# Altium PCB PCB2_new.PcbDoc
Units mm, origin at the board's own origin, x right, y up, seen from the top; angles counter-clockwise.
Board outline 152.4 x 101.6 mm, 2 copper layers (Top Layer, Bottom Layer); 19 components, 32 nets, 102 pads, 0 vias.
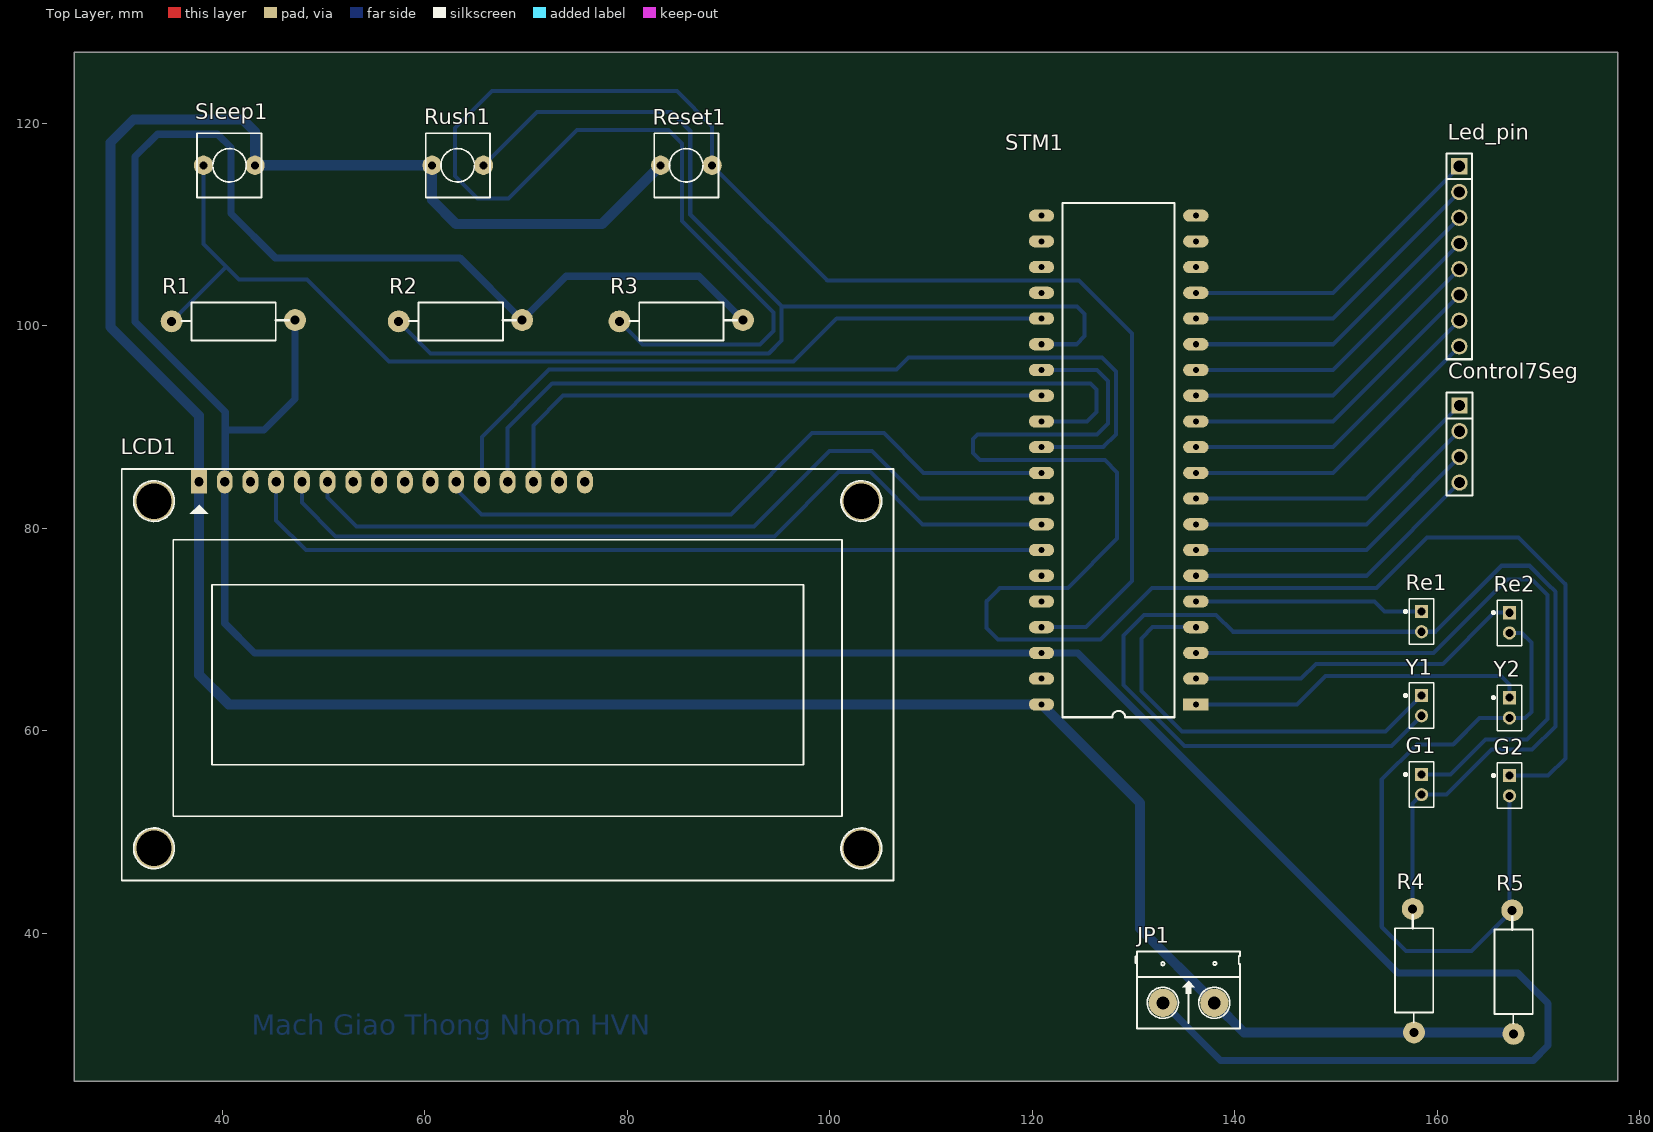
[diagram p0: Top Layer view]
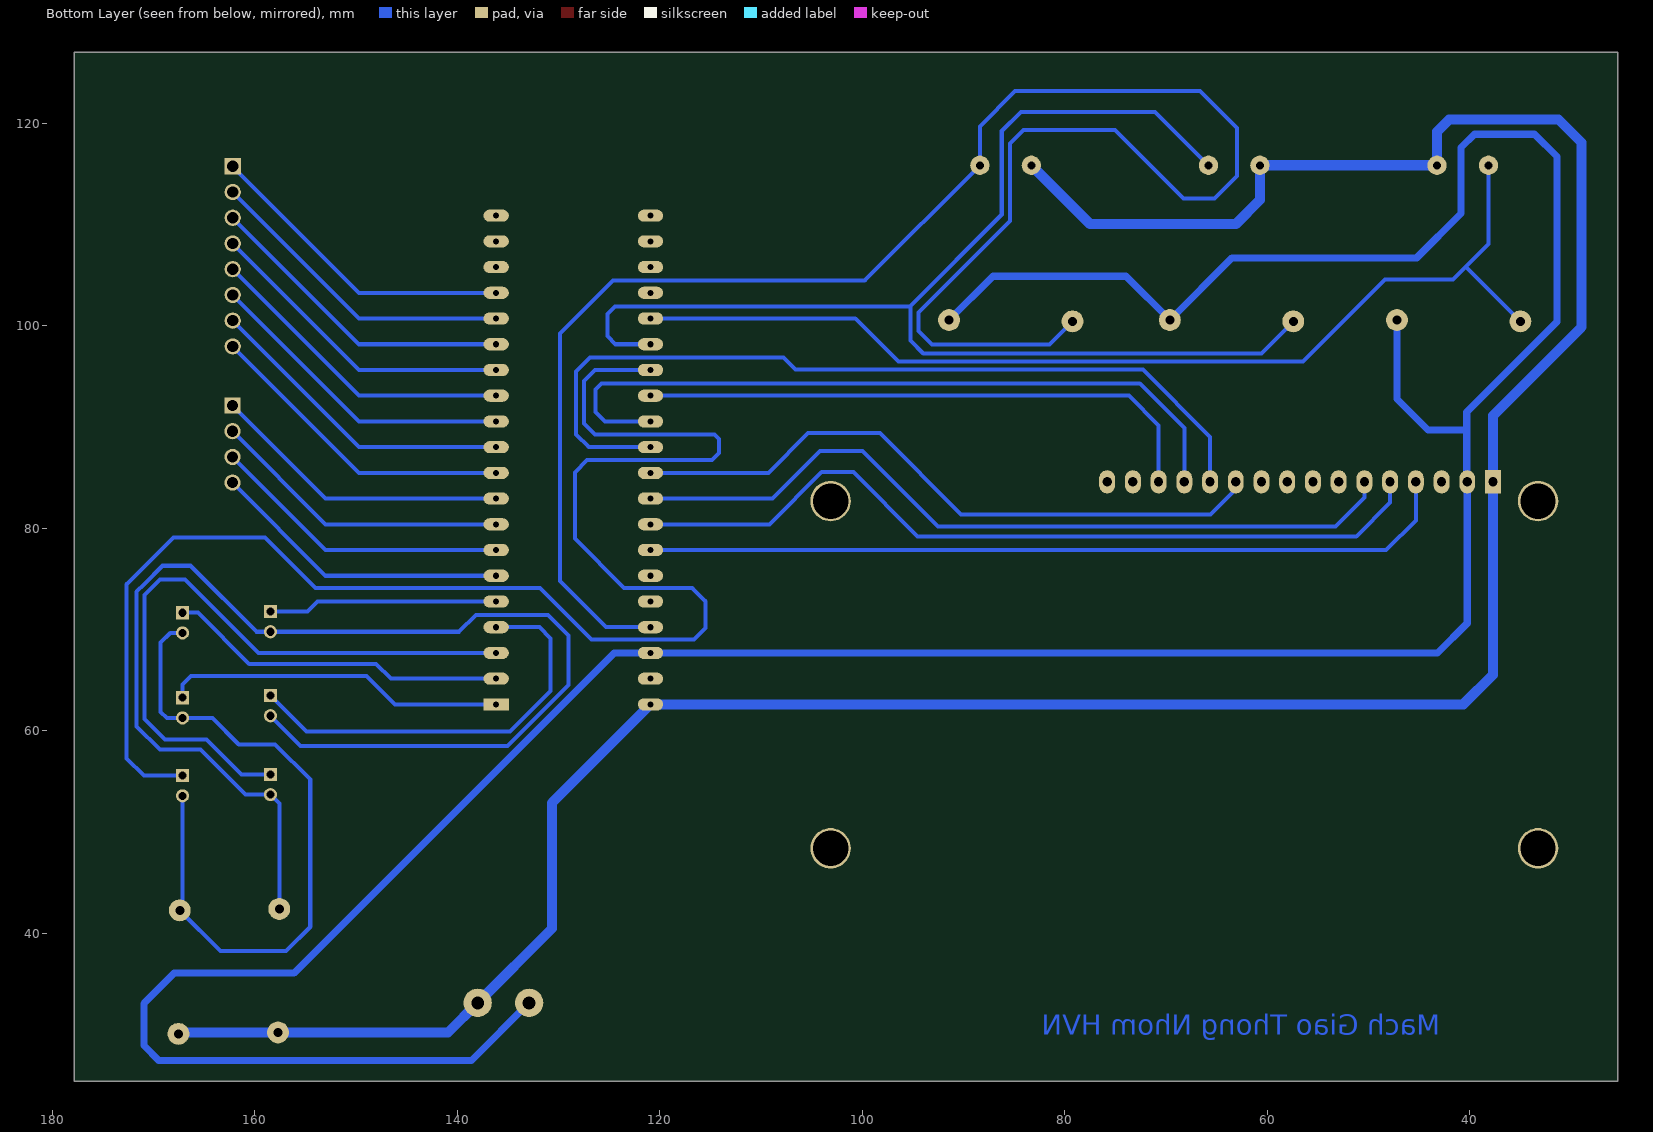
[diagram p1: Bottom Layer view, seen from below]
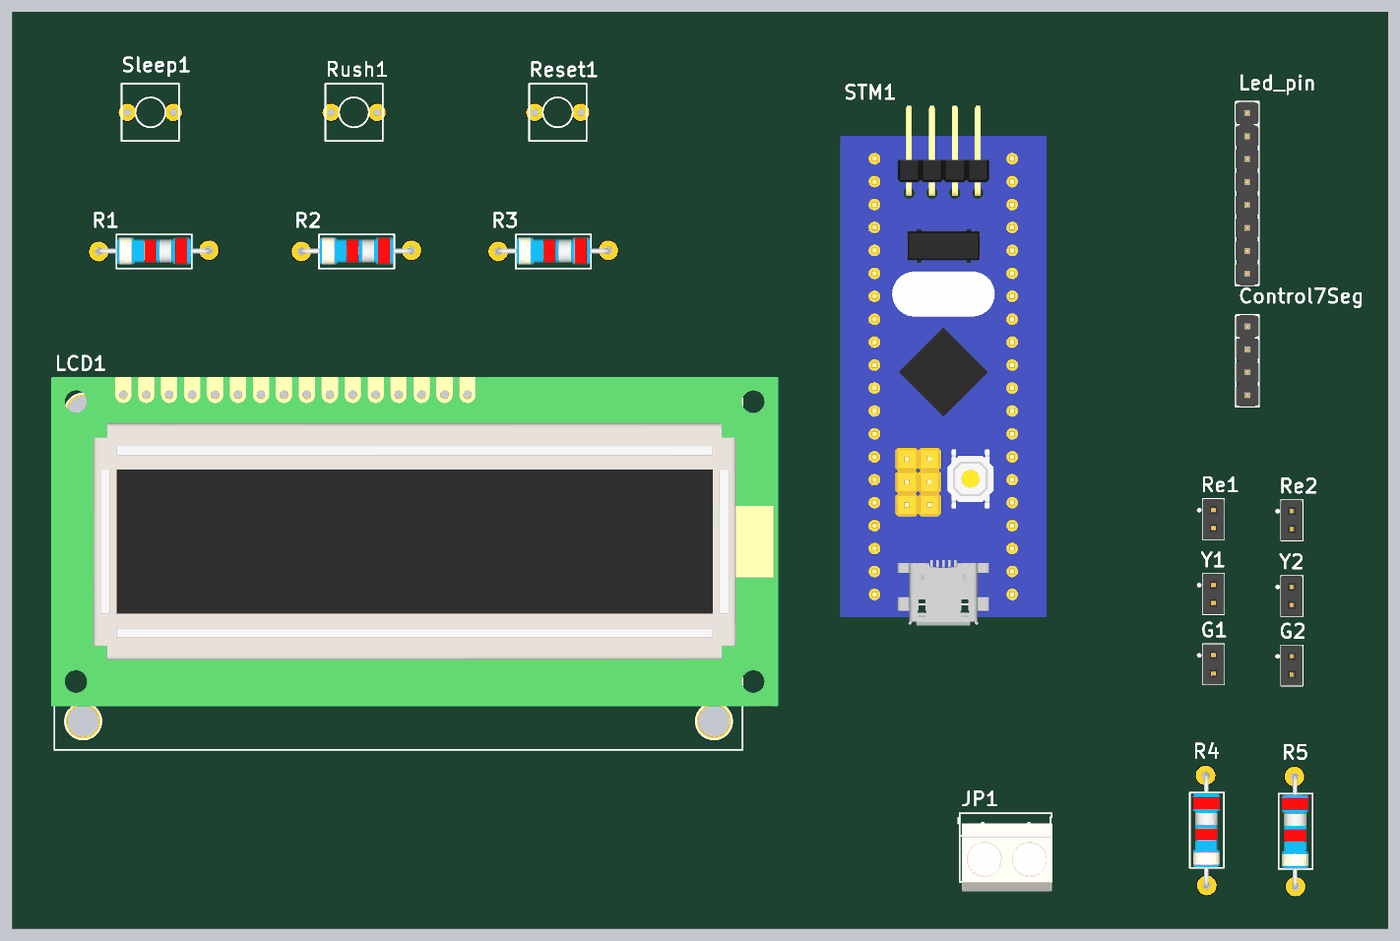
[diagram p2: 3D render of the assembled board from above, using the file's embedded part models]

## Layer stack, top to bottom
Top Solder: solder mask 0.0102, Solder Resist, Dk 3.5
Top Layer: signal copper 0.0356
Dielectric 1: dielectric 0.32, FR-4, Dk 4.8
Bottom Layer: signal copper 0.0356
Bottom Solder: solder mask 0.0102, Solder Resist, Dk 3.5

## Board outline
25.4,25.4 177.8,25.4 177.8,127 25.4,127

## Design rules (kind name [scope] priority, off if disabled: settings)
Clearance [All] p1: gap=0.4
PolygonConnect [All] p1: connectstyle=Relief reliefconductorwidth=0.254 reliefentries=4 polygonreliefangle="90 Angle" airgapwidth=0.254
RoutingLayers [All] p1: top layer_v5=FALSE bottom layer_v5=TRUE
RoutingVias [All] p1: holewidth=0.711 width=1.27 viastyle="Through Hole" minholewidth=0.711 minwidth=1.27 maxholewidth=0.711 maxwidth=1.27
SolderMaskExpansion [All] p1: expansion=0.102
Width GND [InNet('GND')] p1: maxlimit=1 minlimit=1 preferedwidth=1
Width VCC [InNet('VCC')] p2: maxlimit=0.7 minlimit=0.7 preferedwidth=0.7
Width NET [All] p3: maxlimit=0.4 minlimit=0.4 preferedwidth=0.4
29 further rules are at their usual default settings.

## Components (designator, comment, footprint, x,y, rotation, side; value= is the part's Value field where it differs from the comment)
Control7Seg "JP 1x4 2.54" "JP 1x4 DT" 162.177,92.126 r270 top
G1 "JP2x1-2.0" J2-C1T 158.43,54.701 r270 top
G2 "JP2x1-2.0" J2-C1T 167.114,54.581 r270 top
JP1 "Header 2_1" HED2 132.886,33.142 r0 top
LCD1 "LCD1602 XL" LCD1602 37.714,84.592 r0 top
Led_pin "JP 1x8 2.54" "JP 1x8 DT" 162.156,115.741 r270 top
R1 "Res" RES-1/2W 41.613,100.434 r180 top
R2 "Res" RES-1/2W 64.036,100.434 r180 top
R3 "Res" RES-1/2W 85.833,100.434 r180 top
R4 "Res" RES-1/2W 157.685,36.822 r270 top
R5 "Res" RES-1/2W 167.514,36.686 r270 top
Re1 "JP2x1-2.0" J2-C1T 158.43,70.784 r270 top
Re2 "JP2x1-2.0" J2-C1T 167.114,70.664 r270 top
Reset1 "SW" SW2 83.3,115.841 r0 top
Rush1 "SW" SW2 60.732,115.841 r0 top
Sleep1 "SW" SW2 43.243,115.841 r180 top
STM1 "KIT STM32F103C8T6" "STM32F103 KIT" 136.144,62.611 r180 top
Y1 "JP2x1-2.0" J2-C1T 158.43,62.487 r270 top
Y2 "JP2x1-2.0" J2-C1T 167.114,62.272 r270 top

## Footprints (in the part's own frame and the unit in brackets; to place one, negate y for a bottom-side part, rotate by r counter-clockwise, add the part's x,y. Pads: shape width x height; smd on the part's side, far side on the other; paste and mask are expansions set on the pad)
HED2 [mil] "Header 2, 2 pin, hight 300mil, Pin to Pin 200, Colour Green"
  round 110 hole 50: 1(0,0) 2(200,0)
  silkscreen extent -106,-100 300,200, body extent -92,-140 302,155, height 394
J2-C1T [mm] "2p, 1 row, straight, gold plating"
  rect 1.3x1.3 hole 0.8: 1(-1,0)
  round 1.3 hole 0.8: 2(1,0)
  silkscreen extent -2.25,-1.71 2.25,1.2, body extent -2.25,-1.2 2.25,1.2, height 4.31
"JP 1x4 DT" [mm] "4 pins, 1 row, straight, gold plating"
  rect 1.6x1.6 hole 1.1: 1(0,0)
  round 1.6 hole 1.1: 2(2.54,0) 3(5.08,0) 4(7.62,0)
  silkscreen extent -1.27,-1.27 8.89,1.27, body extent -1.27,-1.27 8.89,1.27, height 8.54
"JP 1x8 DT" [mm] "8 pins, 1 row, straight, gold plating"
  rect 1.6x1.6 hole 1.1: 1(0,0)
  round 1.6 hole 1.1: 2(2.54,0) 3(5.08,0) 4(7.62,0) 5(10.16,0) 6(12.7,0) 7(15.24,0) 8(17.78,0)
  silkscreen extent -1.27,-1.27 19.05,1.27, body extent -1.27,-1.27 19.05,1.27, height 8.54
LCD1602 [mil] "LCD dipslay 16x2, 16 pin"
  rect 62x90 hole 36: 1(0,0)
  oval 62x90 hole 36: 2(100,0) 3(200,0) 4(300,0) 5(400,0) 6(500,0) 7(600,0) 8(700,0) 9(800,0) 10(900,0) 11(1000,0) 12(1100,0) 13(1200,0) 14(1300,0) 15(1400,0) 16(1500,0)
  round 157.48 hole 137.8: "Hole 0"(-175,-1425) "Hole 0"(-175,-75) "Hole 0"(2575,-1425) "Hole 0"(2575,-75)
  silkscreen extent -300,-1550 2700,50, body extent -315,-1360 2855,77, height 414
RES-1/2W [mil]
  round 85 hole 35: 1(-220,-5) 2(260,0)
  silkscreen extent -195,-74 221,75, body extent -230,-60 270,56, height 121
"STM32F103 KIT" [mm]
  rect 2.5x1.2 hole 0.6: 1(0,0)
  oval 2.5x1.2 hole 0.6: 2(0,-2.54) 3(0,-5.08) 4(0,-7.62) 5(0,-10.16) 6(0,-12.7) 7(0,-15.24) 8(0,-17.78) 9(0,-20.32) 10(0,-22.86) 11(0,-25.4) 12(0,-27.94) 13(0,-30.48) 14(0,-33.02) 15(0,-35.56) 16(0,-38.1) 17(0,-40.64) 18(0,-43.18) 19(0,-45.72) 20(0,-48.26) 21(15.24,-48.26) 22(15.24,-45.72) 23(15.24,-43.18) 24(15.24,-40.64) 25(15.24,-38.1) 26(15.24,-35.56) 27(15.24,-33.02) 28(15.24,-30.48) 29(15.24,-27.94) 30(15.24,-25.4) 31(15.24,-22.86) 32(15.24,-20.32) 33(15.24,-17.78) 34(15.24,-15.24) 35(15.24,-12.7) 36(15.24,-10.16) 37(15.24,-7.62) 38(15.24,-5.08) 39(15.24,-2.54) 40(15.24,0)
  silkscreen extent 2.08,-49.53 13.16,1.27, body extent -3.81,-53.97 19.05,3.59, height 16.12
SW2 [mil] "SW button 2pin, 250x 250 mil"
  round 75 hole 31: 1(0,0) 2(200,0)
  silkscreen extent -25,-125 225,125

## Part data
Control7Seg: library part "JP 1x4 2.54 Duc Thang", "C?m"
G1 G2 Re1 Re2 Y1 Y2: "WR-PHD 2.00 mm Socket Header"
JP1: "Header, 2-Pin"
LCD1: "LCD 1602 Xanh La"
Led_pin: library part "JP 1x8 2.54 Duc Thang", "C?m"
Reset1 Rush1 Sleep1: library part SW2, "Switch button 2 pin"
STM1: library part "STM32f103 Bluepill", "KIT STM32F103C8T6 Bluepill"

## Nets (pads, with @x,y where several pads share a name; then routed paths per layer and width w, separated by ;. In a path a pad name is that pad's centre, name@x,y a point inside that pad or via, vN(x,y) a via of type N, cw(c..) or ccw(c..) an arc to the next point about the centre after c; other vN are vias at no path point)
G1: G2.1 STM1.27 | length 153.4
  Bottom Layer w0.4: STM1.27 126.381,95.631 127.461,94.551 127.461,90.342 126.4,89.281 114.598,89.281 114.122,88.805 114.122,87.441 114.822,86.741 127.159,86.741 128.372,85.528 128.372,78.973 123.511,74.111 116.784,74.111 115.465,72.792 115.465,70.136 116.59,69.012 126.728,69.012 131.808,74.092 153.985,74.092 158.987,79.094 168.001,79.094 172.623,74.472 172.623,57.287 170.917,55.581 G2.1
GND: JP1.2 LCD1.1 R4.2 R5.2 Reset1.1 Rush1.1 Sleep1.1 STM1.40 | length 273.8
  Bottom Layer w1: Reset1.1 77.489,110.03 63.121,110.03 60.732,112.42 Rush1.1 Sleep1.1 43.243,119.163 42.039,120.367 31.246,120.367 28.981,118.102 28.981,99.858 37.714,91.125 LCD1.1 37.714,65.537 40.64,62.611 STM1.40 130.625,52.89 130.625,40.483 JP1.2 140.89,30.218 R4.2 167.377,30.218 R5.2
NetControl7Seg_1: Control7Seg.1 STM1.9 | length 29.8
  Bottom Layer w0.4: STM1.9 152.982,82.931 Control7Seg.1
NetControl7Seg_2: Control7Seg.2 STM1.8 | length 29.8
  Bottom Layer w0.4: STM1.8 152.982,80.391 Control7Seg.2
NetControl7Seg_3: Control7Seg.3 STM1.7 | length 29.8
  Bottom Layer w0.4: STM1.7 152.982,77.851 Control7Seg.3
NetControl7Seg_4: Control7Seg.4 STM1.6 | length 29.8
  Bottom Layer w0.4: STM1.6 152.982,75.311 Control7Seg.4
NetG1_1: G1.1 STM1.3 | length 65.2
  Bottom Layer w0.4: STM1.3 159.611,67.691 166.852,74.932 169.318,74.932 170.707,73.542 170.847,73.403 170.847,61.19 168.822,59.165 164.752,59.165 161.288,55.701 G1.1
NetG1_2: G1.2 R4.1 Re1.2 Y1.2 | length 126.9
  Bottom Layer w0.4: R4.1 157.558,52.829 G1.2 160.882,53.701 165.335,58.154 169.354,58.154 171.647,60.447 171.647,73.734 170.87,74.51 169.081,76.3 166.343,76.3 159.827,69.784 Re1.2 139.792,69.784 138.125,71.45 131.046,71.45 129.004,69.408 129.004,64.544 135.026,58.522 155.465,58.522 Y1.2
NetG2_2: G2.2 R5.1 Re2.2 Y2.2 | length 68.4
  Bottom Layer w0.4: G2.2 167.114,42.546 R5.1 163.368,38.255 156.899,38.255 154.501,40.654 154.501,55.18 157.982,58.661 161.561,58.661 164.172,61.272 Y2.2 168.668,61.272 169.27,61.875 169.27,68.719 168.325,69.664 Re2.2
NetLCD1_4: LCD1.4 STM1.34 | length 80.6
  Bottom Layer w0.4: LCD1.4 45.334,80.777 48.26,77.851 STM1.34
NetLCD1_5: LCD1.5 STM1.33 | length 81.2
  Bottom Layer w0.4: LCD1.5 47.874,82.55 51.215,79.209 94.549,79.209 100.879,85.539 103.996,85.539 109.144,80.391 STM1.33
NetLCD1_6: LCD1.6 STM1.32 | length 78.3
  Bottom Layer w0.4: LCD1.6 50.414,83.038 53.273,80.178 92.496,80.178 99.966,87.649 104.157,87.649 108.875,82.931 STM1.32
NetLCD1_11: LCD1.11 STM1.31 | length 64.5
  Bottom Layer w0.4: LCD1.11 63.114,83.876 65.614,81.376 90.226,81.376 98.258,89.408 105.336,89.408 109.273,85.471 STM1.31
NetLCD1_12: LCD1.12 STM1.30 | length 84.9
  Bottom Layer w0.4: LCD1.12 65.654,89.022 72.288,95.656 106.578,95.656 107.772,96.85 126.876,96.85 128.261,95.465 128.261,89.272 126.999,88.011 STM1.30
NetLCD1_13: LCD1.13 STM1.29 | length 73.6
  Bottom Layer w0.4: LCD1.13 68.194,89.911 72.593,94.31 125.754,94.31 126.352,93.712 126.352,91.492 125.411,90.551 STM1.29
NetLCD1_14: LCD1.14 STM1.28 | length 57
  Bottom Layer w0.4: LCD1.14 70.734,90.165 73.66,93.091 STM1.28
NetLed_pin_1: Led_pin.1 STM1.17 | length 31.2
  Bottom Layer w0.4: STM1.17 149.666,103.251 Led_pin.1
NetLed_pin_2: Led_pin.2 STM1.16 | length 31.2
  Bottom Layer w0.4: STM1.16 149.666,100.711 Led_pin.2
NetLed_pin_3: Led_pin.3 STM1.15 | length 31.2
  Bottom Layer w0.4: STM1.15 149.666,98.171 Led_pin.3
NetLed_pin_4: Led_pin.4 STM1.14 | length 31.2
  Bottom Layer w0.4: STM1.14 149.666,95.631 Led_pin.4
NetLed_pin_5: Led_pin.5 STM1.13 | length 31.2
  Bottom Layer w0.4: STM1.13 149.666,93.091 Led_pin.5
NetLed_pin_6: Led_pin.6 STM1.12 | length 31.2
  Bottom Layer w0.4: STM1.12 149.666,90.551 Led_pin.6
NetLed_pin_7: Led_pin.7 STM1.11 | length 31.2
  Bottom Layer w0.4: STM1.11 149.666,88.011 Led_pin.7
NetLed_pin_8: Led_pin.8 STM1.10 | length 31.2
  Bottom Layer w0.4: STM1.10 149.666,85.471 Led_pin.8
NetRe1_1: Re1.1 STM1.5 | length 22.7
  Bottom Layer w0.4: STM1.5 153.795,72.771 154.782,71.784 Re1.1
NetRe2_1: Re2.1 STM1.2 | length 33.7
  Bottom Layer w0.4: STM1.2 146.533,65.151 147.998,66.616 160.526,66.616 165.574,71.664 Re2.1
NetSTM1_1: STM1.1 Y2.1 | length 33.8
  Bottom Layer w0.4: STM1.1 146.152,62.611 148.953,65.413 166.264,65.413 167.114,64.563 Y2.1
NetSTM1_4: STM1.4 Y1.1 | length 41.8
  Bottom Layer w0.4: STM1.4 131.883,70.231 130.76,69.108 130.76,63.919 134.761,59.919 154.862,59.919 Y1.1
RESET: R3.2 Reset1.2 STM1.37 | length 186.2
  Bottom Layer w0.4: R3.2 81.522,98.141 93.086,98.141 94.441,99.495 94.441,101.31 85.421,110.329 85.421,117.983 84.068,119.336 75.031,119.336 68.271,112.576 65.199,112.576 63.004,114.771 63.004,119.541 66.633,123.169 84.893,123.169 88.38,119.682 Reset1.2 99.751,104.47 124.608,104.47 129.857,99.221 129.857,74.781 125.307,70.231 STM1.37
RUSH: R2.2 Rush1.2 STM1.26 | length 124.4
  Bottom Layer w0.4: R2.2 60.591,97.274 93.972,97.274 95.241,98.543 95.241,101.92 124.392,101.92 125.167,101.145 125.167,98.99 124.348,98.171 STM1.26 ; Rush1.2 71.087,121.116 84.313,121.116 86.221,119.208 86.221,110.972 95.241,101.952
SLEEP: R1.2 Sleep1.2 STM1.25 | length 104.7
  Bottom Layer w0.4: R1.2 40.381,105.806 40.381,105.863 ; Sleep1.2 38.163,108.081 40.381,105.863 ; STM1.25 100.686,100.711 96.431,96.456 56.474,96.456 48.368,104.562 41.683,104.562 40.381,105.863
VCC: JP1.1 LCD1.2 R1.1 R2.1 R3.1 STM1.38 | length 333.1
  Bottom Layer w0.7: R1.1 47.201,92.763 44.148,89.71 40.304,89.71 ; R3.1 87.093,104.888 73.951,104.888 R2.1 63.479,106.705 45.239,106.705 40.861,111.083 40.861,117.585 39.541,118.905 33.601,118.905 31.396,116.699 31.396,100.386 40.304,91.479 40.304,89.71 ; JP1.1 138.571,27.457 169.468,27.457 170.929,28.918 170.929,33.093 167.955,36.067 156.105,36.067 124.481,67.691 STM1.38 43.18,67.691 40.254,70.617 LCD1.2 40.304,84.642 40.304,89.71
pads on no net: "LCD1.Hole 0" LCD1.3 LCD1.7 LCD1.8 LCD1.9 LCD1.10 LCD1.15 LCD1.16 STM1.18 STM1.19 STM1.20 STM1.21 STM1.22 STM1.23 STM1.24 STM1.35 STM1.36 STM1.39

## Other copper
Bottom Layer:
  text "Mach Giao Thong Nhom HVN" at 42.9,30 h2